# EAGLE board MicroViewUSB-Panel-v02 (EAGLE 6.5.0), part 1 of 2
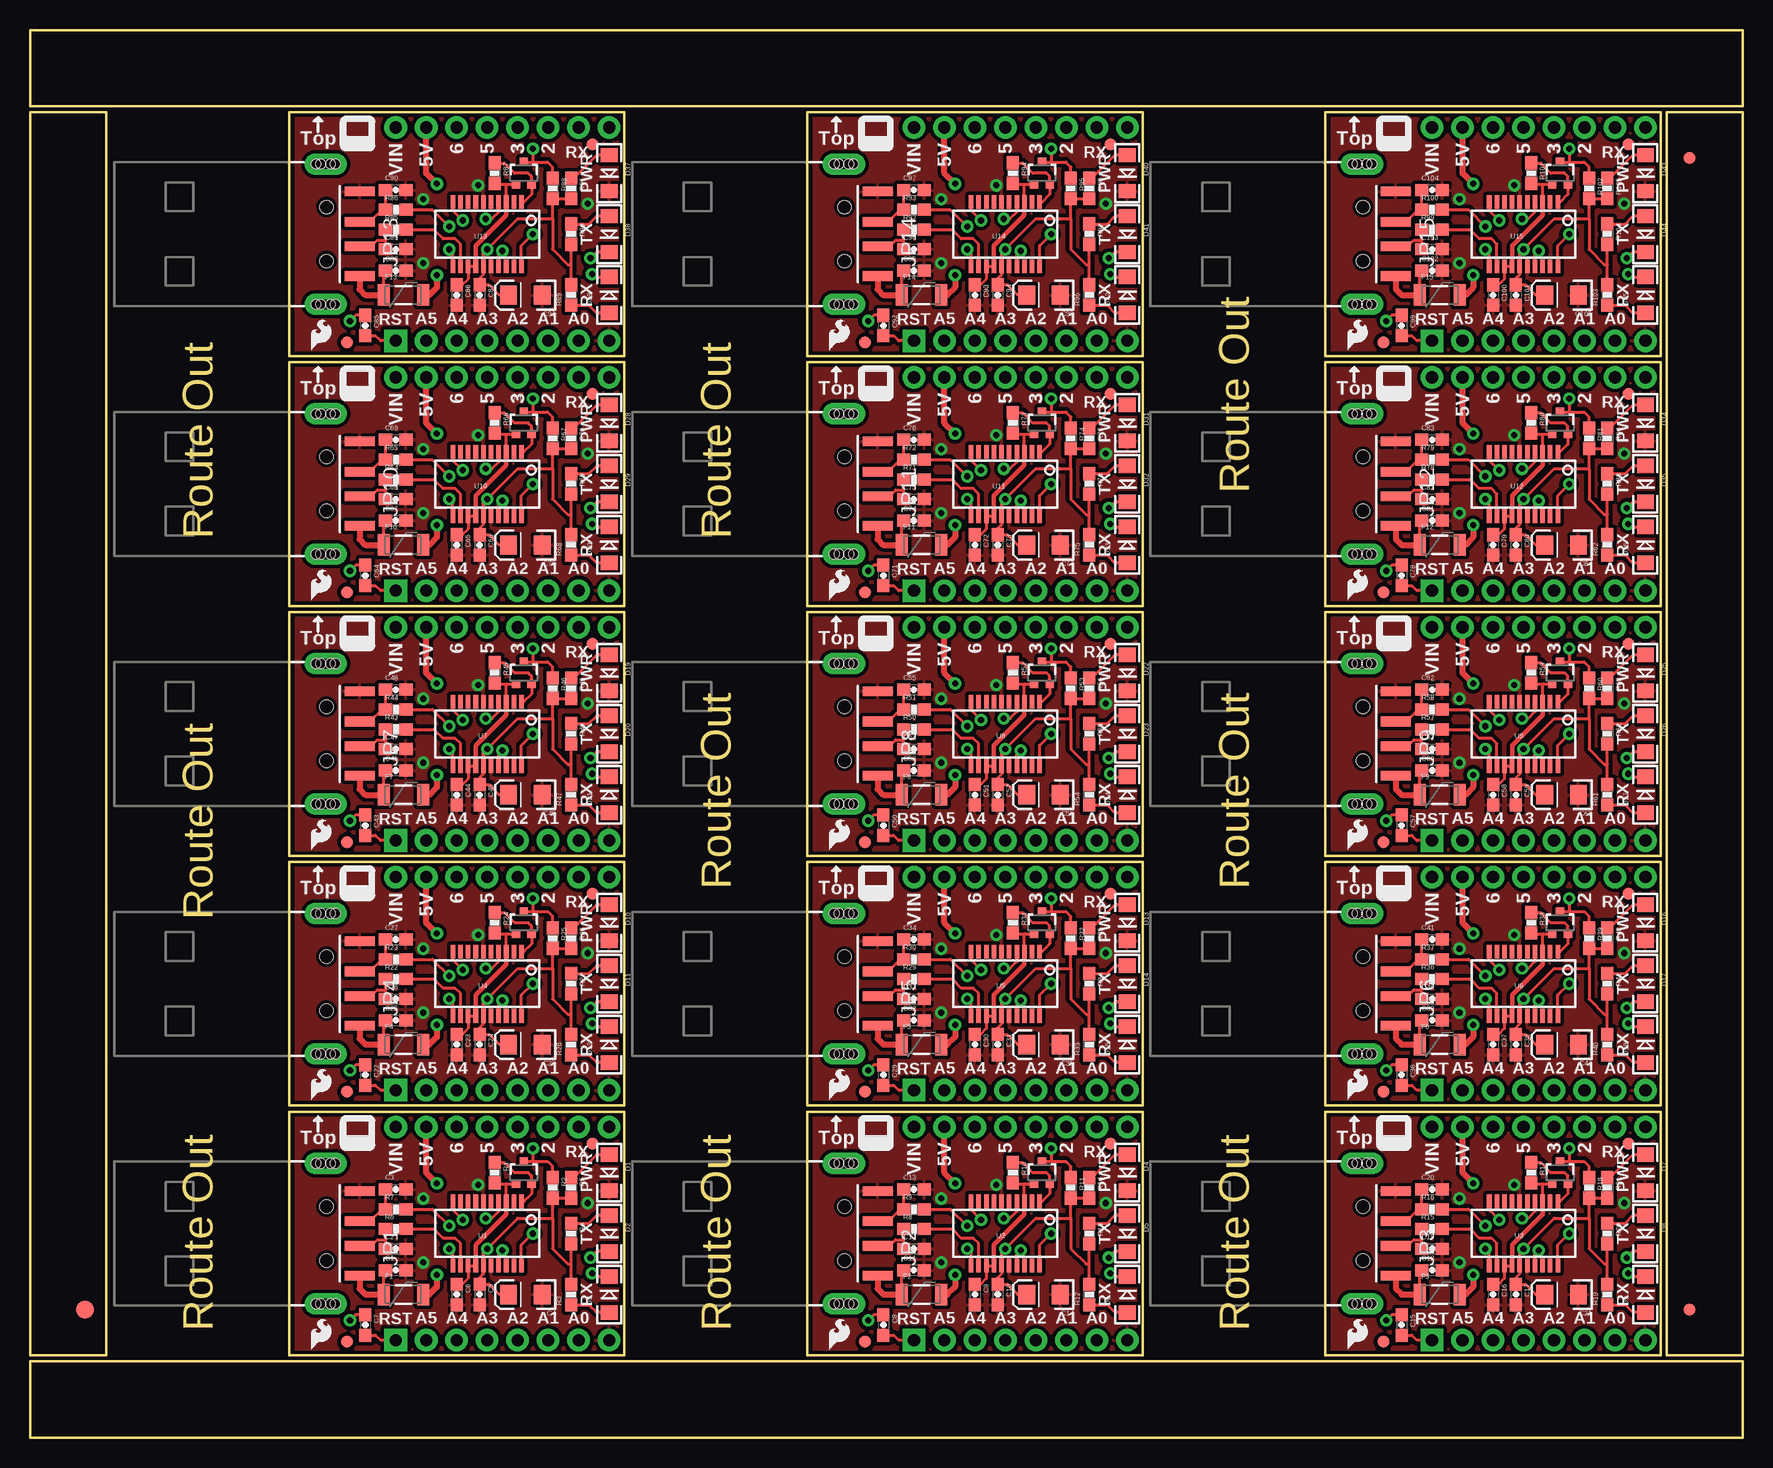
[diagram p0: board, top side]
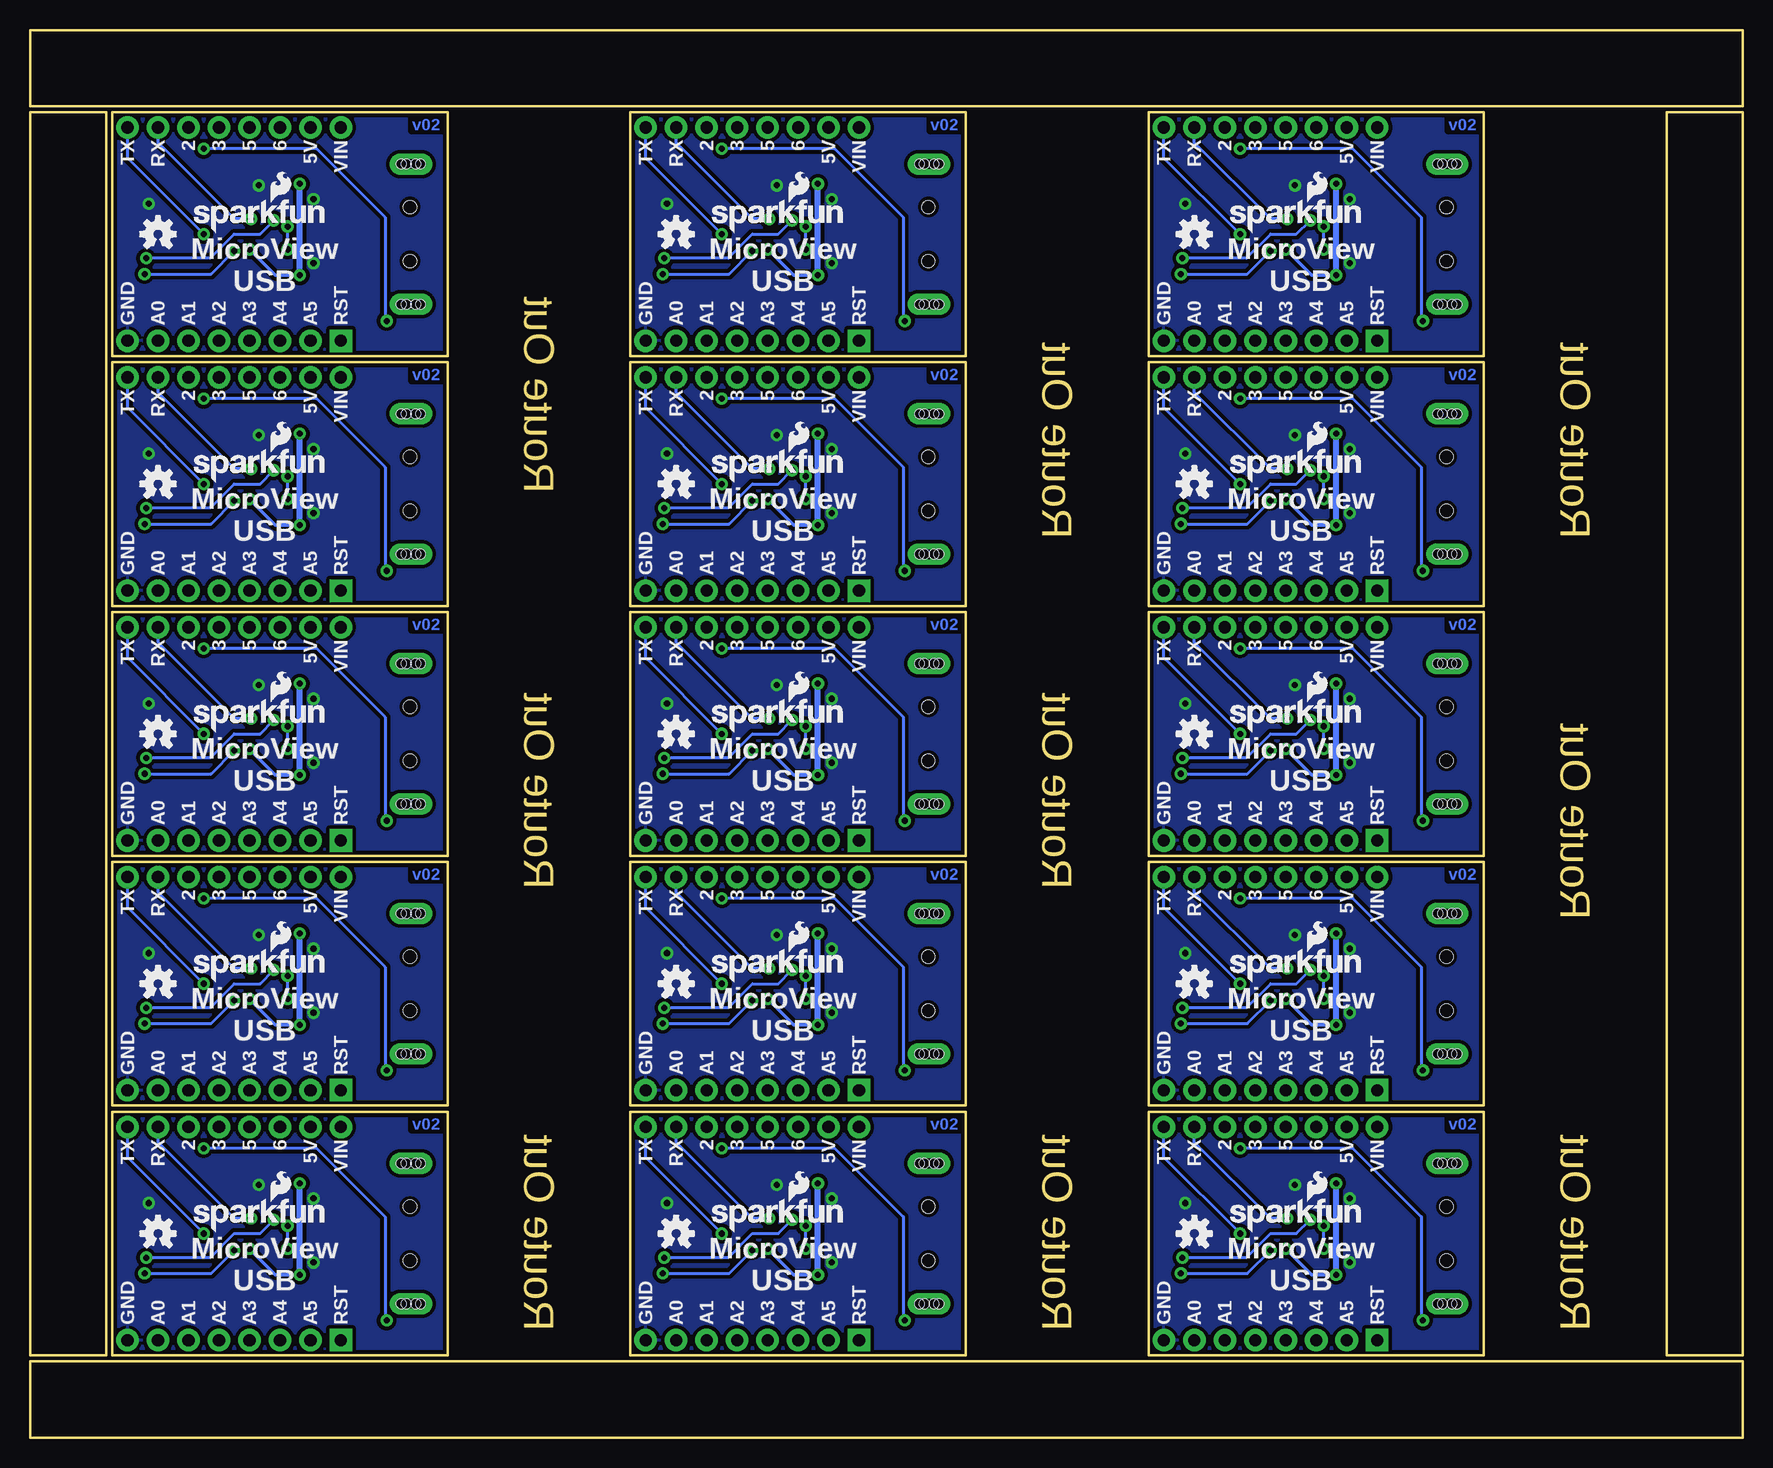
[diagram p1: board, bottom side, seen from below]

Size 142.75 x 117.35 mm. Coordinates in mm from the lower left corner, seen from the top.
Outline: 21.59,6.86 49.53,6.86 49.53,27.18 21.59,27.18 21.59,6.86
Outline: 64.77,6.86 92.71,6.86 92.71,27.18 64.77,27.18 64.77,6.86
Outline: 107.95,6.86 135.89,6.86 135.89,27.18 107.95,27.18 107.95,6.86
Outline: 21.59,27.69 49.53,27.69 49.53,48.01 21.59,48.01 21.59,27.69
Outline: 64.77,27.69 92.71,27.69 92.71,48.01 64.77,48.01 64.77,27.69
Outline: 107.95,27.69 135.89,27.69 135.89,48.01 107.95,48.01 107.95,27.69
Outline: 21.59,48.51 49.53,48.51 49.53,68.83 21.59,68.83 21.59,48.51
Outline: 64.77,48.51 92.71,48.51 92.71,68.83 64.77,68.83 64.77,48.51
Outline: 107.95,48.51 135.89,48.51 135.89,68.83 107.95,68.83 107.95,48.51
Outline: 21.59,69.34 49.53,69.34 49.53,89.66 21.59,89.66 21.59,69.34
Outline: 64.77,69.34 92.71,69.34 92.71,89.66 64.77,89.66 64.77,69.34
Outline: 107.95,69.34 135.89,69.34 135.89,89.66 107.95,89.66 107.95,69.34
Outline: 21.59,90.17 49.53,90.17 49.53,110.49 21.59,110.49 21.59,90.17
Outline: 64.77,90.17 92.71,90.17 92.71,110.49 64.77,110.49 64.77,90.17
Outline: 107.95,90.17 135.89,90.17 135.89,110.49 107.95,110.49 107.95,90.17
Outline: 6.35,6.86 6.35,110.49 0,110.49 0,6.86 6.35,6.86
Outline: 0,0 142.75,0 142.75,6.35 0,6.35 0,0
Outline: 0,111 142.75,111 142.75,117.35 0,117.35 0,111
Outline: 136.4,110.49 136.4,6.86 142.75,6.86 142.75,110.49 136.4,110.49
Copper layers (1*16): Top 0.035mm / dielectric 1.5mm / Bottom 0.035mm
Design rules "SparkFun-2-layer": minimum track width 7mil, minimum drill 15mil, track to track 8mil, track to pad 8mil, pad to pad 8mil, via to via 8mil, smd to smd 8mil, copper to edge 8mil, drill to drill 8mil, minimum pad ring 12mil, minimum via ring 10mil, stop-mask expansion 4mil, vias tented up to drill 20mil, thermal gap 10mil
Net classes: 0 default: width 0.152 mm, drill 0.305 mm, clearance 0.152 mm

## Footprints (pad centres in the part's own frame; a part is rotated, then mirrored left to right if it is on the bottom)
0603-CAP = smd 1.1 x 1: 1 -0.85,0; 2 0.85,0
EIA3216 = smd 1.4 x 1.6: A 1.4,0; C -1.4,0
LED-1206 = smd 1.2 x 1.4: A -1.5,0; C 1.5,0
FIDUCIAL-1.5X3 = smd 1.5 x 1.5: 1 0,0
FIDUCIAL-1X2 = smd 1 x 1: 1 0,0
PTC-1206-WIDE = smd 1 x 1.8: 1 -1.654,0; 2 1.654,0
MV-DIP16-NODIMENSION = drill 1.016 pad 1.88 square: 1 0,0 | drill 1.016 pad 1.88: 2 2.54,0; 3 5.08,0; 4 7.62,0; 5 10.16,0; 6 12.7,0; 7 15.24,0; 8 17.78,0; 9 17.78,17.78; 10 15.24,17.78; 11 12.7,17.78; 12 10.16,17.78; 13 7.62,17.78; 14 5.08,17.78; 15 2.54,17.78; 16 0,17.78
USB-A-SMT-MALE = smd 0.8 x 2.5: D+1 1.027,-5.87; D-1 -1.027,-5.87; GND1 3.551,-5.87; VBUS1 -3.5,-5.87 | drill 0.8 pad 1.778 long: P$1 5.85,-3.05; P$3 -5.85,-3.05 | hole 1.1: 2.25,-3.12; -2.25,-3.12 | hole 0.8: -5.85,-3.45; -5.85,-3.85; -5.85,-2.65; -5.85,-2.25; 5.85,-3.45; 5.85,-3.85; 5.85,-2.65; 5.85,-2.25
SOT323 = smd 0.7 x 0.7: 1 -0.65,-0.925; 2 0.65,-0.925; 3 0,0.925
0603-RES = smd 1.1 x 1: 1 -0.85,0; 2 0.85,0
SSOP20_L = smd 0.381 x 1.143: 1 -2.857,-2.68; 2 -2.223,-2.68; 3 -1.587,-2.68; 4 -0.953,-2.68; 5 -0.318,-2.68; 6 0.318,-2.68; 7 0.953,-2.68; 8 1.587,-2.68; 9 2.223,-2.68; 10 2.857,-2.68; 11 2.857,2.68; 12 2.223,2.68; 13 1.587,2.68; 14 0.953,2.68; 15 0.318,2.68; 16 -0.318,2.68; 17 -0.953,2.68; 18 -1.587,2.68; 19 -2.223,2.68; 20 -2.857,2.68

## Placement (x,y rotation side)
C1  0.1uF  [0603-CAP]  30.48,13.97 0 top
C2  47pF  [0603-CAP]  30.48,15.75 0 top
C3  47pF  [0603-CAP]  30.48,20.7 0 top
C4  10uF  [EIA3216]  41.27,11.94 180 top
C5  0.1uF  [0603-CAP]  37.47,11.94 270 top
C6  0.1uF  [0603-CAP]  35.56,11.94 270 top
C7  0.1uF  [0603-CAP]  27.94,9.4 270 top
C8  0.1uF  [0603-CAP]  71.12,9.4 270 top
C9  0.1uF  [0603-CAP]  78.74,11.94 270 top
C10  0.1uF  [0603-CAP]  80.64,11.94 270 top
C11  0.1uF  [0603-CAP]  73.66,13.97 0 top
C12  47pF  [0603-CAP]  73.66,15.75 0 top
C13  47pF  [0603-CAP]  73.66,20.7 0 top
C14  10uF  [EIA3216]  84.45,11.94 180 top
C15  0.1uF  [0603-CAP]  114.3,9.4 270 top
C16  0.1uF  [0603-CAP]  121.92,11.94 270 top
C17  0.1uF  [0603-CAP]  123.83,11.94 270 top
C18  0.1uF  [0603-CAP]  116.84,13.97 0 top
C19  47pF  [0603-CAP]  116.84,15.75 0 top
C20  47pF  [0603-CAP]  116.84,20.7 0 top
C21  10uF  [EIA3216]  127.64,11.94 180 top
C22  0.1uF  [0603-CAP]  27.94,30.23 270 top
C23  0.1uF  [0603-CAP]  35.56,32.77 270 top
C24  0.1uF  [0603-CAP]  37.47,32.77 270 top
C25  0.1uF  [0603-CAP]  30.48,34.8 0 top
C26  47pF  [0603-CAP]  30.48,36.58 0 top
C27  47pF  [0603-CAP]  30.48,41.53 0 top
C28  10uF  [EIA3216]  41.27,32.77 180 top
C29  0.1uF  [0603-CAP]  71.12,30.23 270 top
C30  0.1uF  [0603-CAP]  78.74,32.77 270 top
C31  0.1uF  [0603-CAP]  80.64,32.77 270 top
C32  0.1uF  [0603-CAP]  73.66,34.8 0 top
C33  47pF  [0603-CAP]  73.66,36.58 0 top
C34  47pF  [0603-CAP]  73.66,41.53 0 top
C35  10uF  [EIA3216]  84.45,32.77 180 top
C36  0.1uF  [0603-CAP]  114.3,30.23 270 top
C37  0.1uF  [0603-CAP]  121.92,32.77 270 top
C38  0.1uF  [0603-CAP]  123.83,32.77 270 top
C39  0.1uF  [0603-CAP]  116.84,34.8 0 top
C40  47pF  [0603-CAP]  116.84,36.58 0 top
C41  47pF  [0603-CAP]  116.84,41.53 0 top
C42  10uF  [EIA3216]  127.64,32.77 180 top
C43  0.1uF  [0603-CAP]  27.94,51.05 270 top
C44  0.1uF  [0603-CAP]  35.56,53.59 270 top
C45  0.1uF  [0603-CAP]  37.47,53.59 270 top
C46  0.1uF  [0603-CAP]  30.48,55.63 0 top
C47  47pF  [0603-CAP]  30.48,57.4 0 top
C48  47pF  [0603-CAP]  30.48,62.36 0 top
C49  10uF  [EIA3216]  41.27,53.59 180 top
C50  0.1uF  [0603-CAP]  71.12,51.05 270 top
C51  0.1uF  [0603-CAP]  78.74,53.59 270 top
C52  0.1uF  [0603-CAP]  80.64,53.59 270 top
C53  0.1uF  [0603-CAP]  73.66,55.63 0 top
C54  47pF  [0603-CAP]  73.66,57.4 0 top
C55  47pF  [0603-CAP]  73.66,62.36 0 top
C56  10uF  [EIA3216]  84.45,53.59 180 top
C57  0.1uF  [0603-CAP]  114.3,51.05 270 top
C58  0.1uF  [0603-CAP]  121.92,53.59 270 top
C59  0.1uF  [0603-CAP]  123.83,53.59 270 top
C60  0.1uF  [0603-CAP]  116.84,55.63 0 top
C61  47pF  [0603-CAP]  116.84,57.4 0 top
C62  47pF  [0603-CAP]  116.84,62.36 0 top
C63  10uF  [EIA3216]  127.64,53.59 180 top
C64  0.1uF  [0603-CAP]  27.94,71.88 270 top
C65  0.1uF  [0603-CAP]  35.56,74.42 270 top
C66  0.1uF  [0603-CAP]  37.47,74.42 270 top
C67  0.1uF  [0603-CAP]  30.48,76.45 0 top
C68  47pF  [0603-CAP]  30.48,78.23 0 top
C69  47pF  [0603-CAP]  30.48,83.19 0 top
C70  10uF  [EIA3216]  41.27,74.42 180 top
C71  0.1uF  [0603-CAP]  71.12,71.88 270 top
C72  0.1uF  [0603-CAP]  78.74,74.42 270 top
C73  0.1uF  [0603-CAP]  80.64,74.42 270 top
C74  0.1uF  [0603-CAP]  73.66,76.45 0 top
C75  47pF  [0603-CAP]  73.66,78.23 0 top
C76  47pF  [0603-CAP]  73.66,83.19 0 top
C77  10uF  [EIA3216]  84.45,74.42 180 top
C78  0.1uF  [0603-CAP]  114.3,71.88 270 top
C79  0.1uF  [0603-CAP]  121.92,74.42 270 top
C80  0.1uF  [0603-CAP]  123.83,74.42 270 top
C81  0.1uF  [0603-CAP]  116.84,76.45 0 top
C82  47pF  [0603-CAP]  116.84,78.23 0 top
C83  47pF  [0603-CAP]  116.84,83.19 0 top
C84  10uF  [EIA3216]  127.64,74.42 180 top
C85  0.1uF  [0603-CAP]  27.94,92.71 270 top
C86  0.1uF  [0603-CAP]  35.56,95.25 270 top
C87  0.1uF  [0603-CAP]  37.47,95.25 270 top
C88  0.1uF  [0603-CAP]  30.48,97.28 0 top
C89  47pF  [0603-CAP]  30.48,99.06 0 top
C90  47pF  [0603-CAP]  30.48,104.01 0 top
C91  10uF  [EIA3216]  41.27,95.25 180 top
C92  0.1uF  [0603-CAP]  71.12,92.71 270 top
C93  0.1uF  [0603-CAP]  78.74,95.25 270 top
C94  0.1uF  [0603-CAP]  80.64,95.25 270 top
C95  0.1uF  [0603-CAP]  73.66,97.28 0 top
C96  47pF  [0603-CAP]  73.66,99.06 0 top
C97  47pF  [0603-CAP]  73.66,104.01 0 top
C98  10uF  [EIA3216]  84.45,95.25 180 top
C99  0.1uF  [0603-CAP]  114.3,92.71 270 top
C100  0.1uF  [0603-CAP]  121.92,95.25 270 top
C101  0.1uF  [0603-CAP]  123.83,95.25 270 top
C102  0.1uF  [0603-CAP]  116.84,97.28 0 top
C103  47pF  [0603-CAP]  116.84,99.06 0 top
C104  47pF  [0603-CAP]  116.84,104.01 0 top
C105  10uF  [EIA3216]  127.64,95.25 180 top
D1  GREEN  [LED-1206]  48.26,22.1 270 top
D2  RED  [LED-1206]  48.26,17.02 270 top
D3  Yellow  [LED-1206]  48.26,11.94 90 top
D4  GREEN  [LED-1206]  91.44,22.1 270 top
D5  RED  [LED-1206]  91.44,17.02 270 top
D6  Yellow  [LED-1206]  91.44,11.94 90 top
D7  GREEN  [LED-1206]  134.62,22.1 270 top
D8  RED  [LED-1206]  134.62,17.02 270 top
D9  Yellow  [LED-1206]  134.62,11.94 90 top
D10  GREEN  [LED-1206]  48.26,42.93 270 top
D11  RED  [LED-1206]  48.26,37.85 270 top
D12  Yellow  [LED-1206]  48.26,32.77 90 top
D13  GREEN  [LED-1206]  91.44,42.93 270 top
D14  RED  [LED-1206]  91.44,37.85 270 top
D15  Yellow  [LED-1206]  91.44,32.77 90 top
D16  GREEN  [LED-1206]  134.62,42.93 270 top
D17  RED  [LED-1206]  134.62,37.85 270 top
D18  Yellow  [LED-1206]  134.62,32.77 90 top
D19  GREEN  [LED-1206]  48.26,63.75 270 top
D20  RED  [LED-1206]  48.26,58.67 270 top
D21  Yellow  [LED-1206]  48.26,53.59 90 top
D22  GREEN  [LED-1206]  91.44,63.75 270 top
D23  RED  [LED-1206]  91.44,58.67 270 top
D24  Yellow  [LED-1206]  91.44,53.59 90 top
D25  GREEN  [LED-1206]  134.62,63.75 270 top
D26  RED  [LED-1206]  134.62,58.67 270 top
D27  Yellow  [LED-1206]  134.62,53.59 90 top
D28  GREEN  [LED-1206]  48.26,84.58 270 top
D29  RED  [LED-1206]  48.26,79.5 270 top
D30  Yellow  [LED-1206]  48.26,74.42 90 top
D31  GREEN  [LED-1206]  91.44,84.58 270 top
D32  RED  [LED-1206]  91.44,79.5 270 top
D33  Yellow  [LED-1206]  91.44,74.42 90 top
D34  GREEN  [LED-1206]  134.62,84.58 270 top
D35  RED  [LED-1206]  134.62,79.5 270 top
D36  Yellow  [LED-1206]  134.62,74.42 90 top
D37  GREEN  [LED-1206]  48.26,105.41 270 top
D38  RED  [LED-1206]  48.26,100.33 270 top
D39  Yellow  [LED-1206]  48.26,95.25 90 top
D40  GREEN  [LED-1206]  91.44,105.41 270 top
D41  RED  [LED-1206]  91.44,100.33 270 top
D42  Yellow  [LED-1206]  91.44,95.25 90 top
D43  GREEN  [LED-1206]  134.62,105.41 270 top
D44  RED  [LED-1206]  134.62,100.33 270 top
D45  Yellow  [LED-1206]  134.62,95.25 90 top
E$1  [FIDUCIAL-1.5X3]  4.57,10.67 0 top
E$6  [FIDUCIAL-1X2]  138.3,106.68 180 top
E$8  [FIDUCIAL-1X2]  138.3,10.67 0 top
F1  500mA  [PTC-1206-WIDE]  31.11,11.94 0 top
F2  500mA  [PTC-1206-WIDE]  74.3,11.94 0 top
F3  500mA  [PTC-1206-WIDE]  117.47,11.94 0 top
F4  500mA  [PTC-1206-WIDE]  31.11,32.77 0 top
F5  500mA  [PTC-1206-WIDE]  74.3,32.77 0 top
F6  500mA  [PTC-1206-WIDE]  117.47,32.77 0 top
F7  500mA  [PTC-1206-WIDE]  31.11,53.59 0 top
F8  500mA  [PTC-1206-WIDE]  74.3,53.59 0 top
F9  500mA  [PTC-1206-WIDE]  117.47,53.59 0 top
F10  500mA  [PTC-1206-WIDE]  31.11,74.42 0 top
F11  500mA  [PTC-1206-WIDE]  74.3,74.42 0 top
F12  500mA  [PTC-1206-WIDE]  117.47,74.42 0 top
F13  500mA  [PTC-1206-WIDE]  31.11,95.25 0 top
F14  500mA  [PTC-1206-WIDE]  74.3,95.25 0 top
F15  500mA  [PTC-1206-WIDE]  117.47,95.25 0 top
FID1  FIDUCIAL1X2  [FIDUCIAL-1X2]  26.42,8 0 top
FID2  FIDUCIAL1X2  [FIDUCIAL-1X2]  46.86,24.51 0 top
FID3  FIDUCIAL1X2  [FIDUCIAL-1X2]  69.6,8 0 top
FID4  FIDUCIAL1X2  [FIDUCIAL-1X2]  90.04,24.51 0 top
FID5  FIDUCIAL1X2  [FIDUCIAL-1X2]  112.78,8 0 top
FID6  FIDUCIAL1X2  [FIDUCIAL-1X2]  133.22,24.51 0 top
FID7  FIDUCIAL1X2  [FIDUCIAL-1X2]  26.42,28.83 0 top
FID8  FIDUCIAL1X2  [FIDUCIAL-1X2]  46.86,45.34 0 top
FID9  FIDUCIAL1X2  [FIDUCIAL-1X2]  69.6,28.83 0 top
FID10  FIDUCIAL1X2  [FIDUCIAL-1X2]  90.04,45.34 0 top
FID11  FIDUCIAL1X2  [FIDUCIAL-1X2]  112.78,28.83 0 top
FID12  FIDUCIAL1X2  [FIDUCIAL-1X2]  133.22,45.34 0 top
FID13  FIDUCIAL1X2  [FIDUCIAL-1X2]  26.42,49.66 0 top
FID14  FIDUCIAL1X2  [FIDUCIAL-1X2]  46.86,66.17 0 top
FID15  FIDUCIAL1X2  [FIDUCIAL-1X2]  69.6,49.66 0 top
FID16  FIDUCIAL1X2  [FIDUCIAL-1X2]  90.04,66.17 0 top
FID17  FIDUCIAL1X2  [FIDUCIAL-1X2]  112.78,49.66 0 top
FID18  FIDUCIAL1X2  [FIDUCIAL-1X2]  133.22,66.17 0 top
FID19  FIDUCIAL1X2  [FIDUCIAL-1X2]  26.42,70.48 0 top
FID20  FIDUCIAL1X2  [FIDUCIAL-1X2]  46.86,87 0 top
FID21  FIDUCIAL1X2  [FIDUCIAL-1X2]  69.6,70.48 0 top
FID22  FIDUCIAL1X2  [FIDUCIAL-1X2]  90.04,87 0 top
FID23  FIDUCIAL1X2  [FIDUCIAL-1X2]  112.78,70.48 0 top
FID24  FIDUCIAL1X2  [FIDUCIAL-1X2]  133.22,87 0 top
FID25  FIDUCIAL1X2  [FIDUCIAL-1X2]  26.42,91.31 0 top
FID26  FIDUCIAL1X2  [FIDUCIAL-1X2]  46.86,107.82 0 top
FID27  FIDUCIAL1X2  [FIDUCIAL-1X2]  69.6,91.31 0 top
FID28  FIDUCIAL1X2  [FIDUCIAL-1X2]  90.04,107.82 0 top
FID29  FIDUCIAL1X2  [FIDUCIAL-1X2]  112.78,91.31 0 top
FID30  FIDUCIAL1X2  [FIDUCIAL-1X2]  133.22,107.82 0 top
J1  MICROVIEW-16ND  [MV-DIP16-NODIMENSION]  30.48,8.13 0 top
J2  MICROVIEW-16ND  [MV-DIP16-NODIMENSION]  73.66,8.13 0 top
J3  MICROVIEW-16ND  [MV-DIP16-NODIMENSION]  116.84,8.13 0 top
J4  MICROVIEW-16ND  [MV-DIP16-NODIMENSION]  30.48,28.96 0 top
J5  MICROVIEW-16ND  [MV-DIP16-NODIMENSION]  73.66,28.96 0 top
J6  MICROVIEW-16ND  [MV-DIP16-NODIMENSION]  116.84,28.96 0 top
J7  MICROVIEW-16ND  [MV-DIP16-NODIMENSION]  30.48,49.78 0 top
J8  MICROVIEW-16ND  [MV-DIP16-NODIMENSION]  73.66,49.78 0 top
J9  MICROVIEW-16ND  [MV-DIP16-NODIMENSION]  116.84,49.78 0 top
J10  MICROVIEW-16ND  [MV-DIP16-NODIMENSION]  30.48,70.61 0 top
J11  MICROVIEW-16ND  [MV-DIP16-NODIMENSION]  73.66,70.61 0 top
J12  MICROVIEW-16ND  [MV-DIP16-NODIMENSION]  116.84,70.61 0 top
J13  MICROVIEW-16ND  [MV-DIP16-NODIMENSION]  30.48,91.44 0 top
J14  MICROVIEW-16ND  [MV-DIP16-NODIMENSION]  73.66,91.44 0 top
J15  MICROVIEW-16ND  [MV-DIP16-NODIMENSION]  116.84,91.44 0 top
JP1  USBA-SMD-MALE  [USB-A-SMT-MALE]  21.59,17.02 90 top
JP2  USBA-SMD-MALE  [USB-A-SMT-MALE]  64.77,17.02 90 top
JP3  USBA-SMD-MALE  [USB-A-SMT-MALE]  107.95,17.02 90 top
JP4  USBA-SMD-MALE  [USB-A-SMT-MALE]  21.59,37.85 90 top
JP5  USBA-SMD-MALE  [USB-A-SMT-MALE]  64.77,37.85 90 top
JP6  USBA-SMD-MALE  [USB-A-SMT-MALE]  107.95,37.85 90 top
JP7  USBA-SMD-MALE  [USB-A-SMT-MALE]  21.59,58.67 90 top
JP8  USBA-SMD-MALE  [USB-A-SMT-MALE]  64.77,58.67 90 top
JP9  USBA-SMD-MALE  [USB-A-SMT-MALE]  107.95,58.67 90 top
JP10  USBA-SMD-MALE  [USB-A-SMT-MALE]  21.59,79.5 90 top
JP11  USBA-SMD-MALE  [USB-A-SMT-MALE]  64.77,79.5 90 top
JP12  USBA-SMD-MALE  [USB-A-SMT-MALE]  107.95,79.5 90 top
JP13  USBA-SMD-MALE  [USB-A-SMT-MALE]  21.59,100.33 90 top
JP14  USBA-SMD-MALE  [USB-A-SMT-MALE]  64.77,100.33 90 top
JP15  USBA-SMD-MALE  [USB-A-SMT-MALE]  107.95,100.33 90 top
LOGO1  SFE_LOGO_FLAME.1_INCH  [SFE_LOGO_FLAME_.1]  23.11,6.99 0 top
LOGO2  OSHW-LOGOS  [OSHW-LOGO-S]  45.72,17.02 0 bottom
LOGO3  SFE_LOGO_NAME_FLAME.1_INCH  [SFE_LOGO_NAME_FLAME_.1]  43.18,17.02 0 bottom
LOGO4  OSHW-LOGOS  [OSHW-LOGO-S]  88.9,17.02 0 bottom
LOGO5  SFE_LOGO_FLAME.1_INCH  [SFE_LOGO_FLAME_.1]  66.29,6.99 0 top
LOGO6  SFE_LOGO_NAME_FLAME.1_INCH  [SFE_LOGO_NAME_FLAME_.1]  86.36,17.02 0 bottom
LOGO7  OSHW-LOGOS  [OSHW-LOGO-S]  132.08,17.02 0 bottom
LOGO8  SFE_LOGO_FLAME.1_INCH  [SFE_LOGO_FLAME_.1]  109.47,6.99 0 top
LOGO9  SFE_LOGO_NAME_FLAME.1_INCH  [SFE_LOGO_NAME_FLAME_.1]  129.54,17.02 0 bottom
LOGO10  OSHW-LOGOS  [OSHW-LOGO-S]  45.72,37.85 0 bottom
LOGO11  SFE_LOGO_FLAME.1_INCH  [SFE_LOGO_FLAME_.1]  23.11,27.81 0 top
LOGO12  SFE_LOGO_NAME_FLAME.1_INCH  [SFE_LOGO_NAME_FLAME_.1]  43.18,37.85 0 bottom
LOGO13  OSHW-LOGOS  [OSHW-LOGO-S]  88.9,37.85 0 bottom
LOGO14  SFE_LOGO_FLAME.1_INCH  [SFE_LOGO_FLAME_.1]  66.29,27.81 0 top
LOGO15  SFE_LOGO_NAME_FLAME.1_INCH  [SFE_LOGO_NAME_FLAME_.1]  86.36,37.85 0 bottom
LOGO16  OSHW-LOGOS  [OSHW-LOGO-S]  132.08,37.85 0 bottom
LOGO17  SFE_LOGO_FLAME.1_INCH  [SFE_LOGO_FLAME_.1]  109.47,27.81 0 top
LOGO18  SFE_LOGO_NAME_FLAME.1_INCH  [SFE_LOGO_NAME_FLAME_.1]  129.54,37.85 0 bottom
LOGO19  OSHW-LOGOS  [OSHW-LOGO-S]  45.72,58.67 0 bottom
LOGO20  SFE_LOGO_FLAME.1_INCH  [SFE_LOGO_FLAME_.1]  23.11,48.64 0 top
LOGO21  SFE_LOGO_NAME_FLAME.1_INCH  [SFE_LOGO_NAME_FLAME_.1]  43.18,58.67 0 bottom
LOGO22  OSHW-LOGOS  [OSHW-LOGO-S]  88.9,58.67 0 bottom
LOGO23  SFE_LOGO_FLAME.1_INCH  [SFE_LOGO_FLAME_.1]  66.29,48.64 0 top
LOGO24  SFE_LOGO_NAME_FLAME.1_INCH  [SFE_LOGO_NAME_FLAME_.1]  86.36,58.67 0 bottom
LOGO25  OSHW-LOGOS  [OSHW-LOGO-S]  132.08,58.67 0 bottom
LOGO26  SFE_LOGO_FLAME.1_INCH  [SFE_LOGO_FLAME_.1]  109.47,48.64 0 top
LOGO27  SFE_LOGO_NAME_FLAME.1_INCH  [SFE_LOGO_NAME_FLAME_.1]  129.54,58.67 0 bottom
LOGO28  OSHW-LOGOS  [OSHW-LOGO-S]  45.72,79.5 0 bottom
LOGO29  SFE_LOGO_FLAME.1_INCH  [SFE_LOGO_FLAME_.1]  23.11,69.47 0 top
LOGO30  SFE_LOGO_NAME_FLAME.1_INCH  [SFE_LOGO_NAME_FLAME_.1]  43.18,79.5 0 bottom
LOGO31  OSHW-LOGOS  [OSHW-LOGO-S]  88.9,79.5 0 bottom
LOGO32  SFE_LOGO_FLAME.1_INCH  [SFE_LOGO_FLAME_.1]  66.29,69.47 0 top
LOGO33  SFE_LOGO_NAME_FLAME.1_INCH  [SFE_LOGO_NAME_FLAME_.1]  86.36,79.5 0 bottom
LOGO34  OSHW-LOGOS  [OSHW-LOGO-S]  132.08,79.5 0 bottom
LOGO35  SFE_LOGO_FLAME.1_INCH  [SFE_LOGO_FLAME_.1]  109.47,69.47 0 top
LOGO36  SFE_LOGO_NAME_FLAME.1_INCH  [SFE_LOGO_NAME_FLAME_.1]  129.54,79.5 0 bottom
LOGO37  OSHW-LOGOS  [OSHW-LOGO-S]  45.72,100.33 0 bottom
LOGO38  SFE_LOGO_FLAME.1_INCH  [SFE_LOGO_FLAME_.1]  23.11,90.3 0 top
LOGO39  SFE_LOGO_NAME_FLAME.1_INCH  [SFE_LOGO_NAME_FLAME_.1]  43.18,100.33 0 bottom
LOGO40  OSHW-LOGOS  [OSHW-LOGO-S]  88.9,100.33 0 bottom
LOGO41  SFE_LOGO_FLAME.1_INCH  [SFE_LOGO_FLAME_.1]  66.29,90.3 0 top
LOGO42  SFE_LOGO_NAME_FLAME.1_INCH  [SFE_LOGO_NAME_FLAME_.1]  86.36,100.33 0 bottom
LOGO43  OSHW-LOGOS  [OSHW-LOGO-S]  132.08,100.33 0 bottom
LOGO44  SFE_LOGO_FLAME.1_INCH  [SFE_LOGO_FLAME_.1]  109.47,90.3 0 top
LOGO45  SFE_LOGO_NAME_FLAME.1_INCH  [SFE_LOGO_NAME_FLAME_.1]  129.54,100.33 0 bottom
Q1  2N7002PW  [SOT323]  41.15,22.1 0 top
Q2  2N7002PW  [SOT323]  84.33,22.1 0 top
Q3  2N7002PW  [SOT323]  127.51,22.1 0 top
Q4  2N7002PW  [SOT323]  41.15,42.93 0 top
Q5  2N7002PW  [SOT323]  84.33,42.93 0 top
Q6  2N7002PW  [SOT323]  127.51,42.93 0 top
Q7  2N7002PW  [SOT323]  41.15,63.75 0 top
Q8  2N7002PW  [SOT323]  84.33,63.75 0 top
Q9  2N7002PW  [SOT323]  127.51,63.75 0 top
Q10  2N7002PW  [SOT323]  41.15,84.58 0 top
Q11  2N7002PW  [SOT323]  84.33,84.58 0 top
Q12  2N7002PW  [SOT323]  127.51,84.58 0 top
Q13  2N7002PW  [SOT323]  41.15,105.41 0 top
Q14  2N7002PW  [SOT323]  84.33,105.41 0 top
Q15  2N7002PW  [SOT323]  127.51,105.41 0 top
R1  10K  [0603-RES]  38.73,22.1 270 top
R2  10K  [0603-RES]  43.56,20.83 270 top
R3  1K  [0603-RES]  45.09,11.94 90 top
R4  1K  [0603-RES]  45.09,17.02 270 top
R5  1K  [0603-RES]  45.09,20.83 270 top
R6  27  [0603-RES]  30.48,17.4 0 top
R7  27  [0603-RES]  30.48,19.05 0 top
R8  27  [0603-RES]  73.66,17.4 0 top
R9  27  [0603-RES]  73.66,19.05 0 top
R10  10K  [0603-RES]  81.92,22.1 270 top
R11  10K  [0603-RES]  86.74,20.83 270 top
R12  1K  [0603-RES]  88.27,11.94 90 top
R13  1K  [0603-RES]  88.27,17.02 270 top
R14  1K  [0603-RES]  88.27,20.83 270 top
R15  27  [0603-RES]  116.84,17.4 0 top
R16  27  [0603-RES]  116.84,19.05 0 top
R17  10K  [0603-RES]  125.09,22.1 270 top
R18  10K  [0603-RES]  129.92,20.83 270 top
R19  1K  [0603-RES]  131.44,11.94 90 top
R20  1K  [0603-RES]  131.44,17.02 270 top
R21  1K  [0603-RES]  131.44,20.83 270 top
R22  27  [0603-RES]  30.48,38.23 0 top
R23  27  [0603-RES]  30.48,39.88 0 top
R24  10K  [0603-RES]  38.73,42.93 270 top
R25  10K  [0603-RES]  43.56,41.66 270 top
R26  1K  [0603-RES]  45.09,32.77 90 top
R27  1K  [0603-RES]  45.09,37.85 270 top
R28  1K  [0603-RES]  45.09,41.66 270 top
R29  27  [0603-RES]  73.66,38.23 0 top
R30  27  [0603-RES]  73.66,39.88 0 top
R31  10K  [0603-RES]  81.92,42.93 270 top
R32  10K  [0603-RES]  86.74,41.66 270 top
R33  1K  [0603-RES]  88.27,32.77 90 top
R34  1K  [0603-RES]  88.27,37.85 270 top
R35  1K  [0603-RES]  88.27,41.66 270 top
R36  27  [0603-RES]  116.84,38.23 0 top
R37  27  [0603-RES]  116.84,39.88 0 top
R38  10K  [0603-RES]  125.09,42.93 270 top
R39  10K  [0603-RES]  129.92,41.66 270 top
R40  1K  [0603-RES]  131.44,32.77 90 top
R41  1K  [0603-RES]  131.44,37.85 270 top
R42  1K  [0603-RES]  131.44,41.66 270 top
R43  27  [0603-RES]  30.48,59.05 0 top
R44  27  [0603-RES]  30.48,60.71 0 top
R45  10K  [0603-RES]  38.73,63.75 270 top
R46  10K  [0603-RES]  43.56,62.48 270 top
R47  1K  [0603-RES]  45.09,53.59 90 top
R48  1K  [0603-RES]  45.09,58.67 270 top
R49  1K  [0603-RES]  45.09,62.48 270 top
R50  27  [0603-RES]  73.66,59.05 0 top
R51  27  [0603-RES]  73.66,60.71 0 top
R52  10K  [0603-RES]  81.92,63.75 270 top
R53  10K  [0603-RES]  86.74,62.48 270 top
R54  1K  [0603-RES]  88.27,53.59 90 top
R55  1K  [0603-RES]  88.27,58.67 270 top
R56  1K  [0603-RES]  88.27,62.48 270 top
R57  27  [0603-RES]  116.84,59.05 0 top
R58  27  [0603-RES]  116.84,60.71 0 top
R59  10K  [0603-RES]  125.09,63.75 270 top
R60  10K  [0603-RES]  129.92,62.48 270 top
R61  1K  [0603-RES]  131.44,53.59 90 top
R62  1K  [0603-RES]  131.44,58.67 270 top
R63  1K  [0603-RES]  131.44,62.48 270 top
R64  27  [0603-RES]  30.48,79.88 0 top
R65  27  [0603-RES]  30.48,81.53 0 top
R66  10K  [0603-RES]  38.73,84.58 270 top
R67  10K  [0603-RES]  43.56,83.31 270 top
R68  1K  [0603-RES]  45.09,74.42 90 top
R69  1K  [0603-RES]  45.09,79.5 270 top
R70  1K  [0603-RES]  45.09,83.31 270 top
R71  27  [0603-RES]  73.66,79.88 0 top
R72  27  [0603-RES]  73.66,81.53 0 top
R73  10K  [0603-RES]  81.92,84.58 270 top
R74  10K  [0603-RES]  86.74,83.31 270 top
R75  1K  [0603-RES]  88.27,74.42 90 top
R76  1K  [0603-RES]  88.27,79.5 270 top
R77  1K  [0603-RES]  88.27,83.31 270 top
R78  27  [0603-RES]  116.84,79.88 0 top
R79  27  [0603-RES]  116.84,81.53 0 top
R80  10K  [0603-RES]  125.09,84.58 270 top
R81  10K  [0603-RES]  129.92,83.31 270 top
R82  1K  [0603-RES]  131.44,74.42 90 top
R83  1K  [0603-RES]  131.44,79.5 270 top
R84  1K  [0603-RES]  131.44,83.31 270 top
R85  27  [0603-RES]  30.48,100.71 0 top
R86  27  [0603-RES]  30.48,102.36 0 top
R87  10K  [0603-RES]  38.73,105.41 270 top
R88  10K  [0603-RES]  43.56,104.14 270 top
R89  1K  [0603-RES]  45.09,95.25 90 top
R90  1K  [0603-RES]  45.09,100.33 270 top
R91  1K  [0603-RES]  45.09,104.14 270 top
R92  27  [0603-RES]  73.66,100.71 0 top
R93  27  [0603-RES]  73.66,102.36 0 top
R94  10K  [0603-RES]  81.92,105.41 270 top
R95  10K  [0603-RES]  86.74,104.14 270 top
R96  1K  [0603-RES]  88.27,95.25 90 top
R97  1K  [0603-RES]  88.27,100.33 270 top
R98  1K  [0603-RES]  88.27,104.14 270 top
R99  27  [0603-RES]  116.84,100.71 0 top
R100  27  [0603-RES]  116.84,102.36 0 top
R101  10K  [0603-RES]  125.09,105.41 270 top
R102  10K  [0603-RES]  129.92,104.14 270 top
R103  1K  [0603-RES]  131.44,95.25 90 top
R104  1K  [0603-RES]  131.44,100.33 270 top
R105  1K  [0603-RES]  131.44,104.14 270 top
U1  FT231XS  [SSOP20_L]  38.1,17.02 180 top
U2  FT231XS  [SSOP20_L]  81.28,17.02 180 top
U3  FT231XS  [SSOP20_L]  124.46,17.02 180 top
U4  FT231XS  [SSOP20_L]  38.1,37.85 180 top
U5  FT231XS  [SSOP20_L]  81.28,37.85 180 top
U6  FT231XS  [SSOP20_L]  124.46,37.85 180 top
U7  FT231XS  [SSOP20_L]  38.1,58.67 180 top
U8  FT231XS  [SSOP20_L]  81.28,58.67 180 top
U9  FT231XS  [SSOP20_L]  124.46,58.67 180 top
U10  FT231XS  [SSOP20_L]  38.1,79.5 180 top
U11  FT231XS  [SSOP20_L]  81.28,79.5 180 top
U12  FT231XS  [SSOP20_L]  124.46,79.5 180 top
U13  FT231XS  [SSOP20_L]  38.1,100.33 180 top
U14  FT231XS  [SSOP20_L]  81.28,100.33 180 top
U15  FT231XS  [SSOP20_L]  124.46,100.33 180 top

## Library data of the parts
C1 C5-C11 C15-C18 C22-C25 C29-C32 C36-C39 C43-C46 C50-C53 C57-C60 C64-C67 C71-C74 C78-C81 C85-C88 C92-C95 C99-C102 = SparkFun-Capacitors; PROD_ID: CAP-00810
C2 C3 C12 C13 C19 C20 C26 C27 C33 C34 C40 C41 C47 C48 C54 C55 C61 C62 C68 C69 C75 C76 C82 C83 C89 C90 C96 C97 C103 C104 = SparkFun-Capacitors; PROD_ID: CAP-08913
C4 C14 C21 C28 C35 C42 C49 C56 C63 C70 C77 C84 C91 C98 C105 = SparkFun-Capacitors; PROD_ID: CAP-00811
D1 D4 D7 D10 D13 D16 D19 D22 D25 D28 D31 D34 D37 D40 D43 = SparkFun-LED; PROD_ID: DIO-00862
D2 D5 D8 D11 D14 D17 D20 D23 D26 D29 D32 D35 D38 D41 D44 = SparkFun-LED; PROD_ID: DIO-00809
D3 D6 D9 D12 D15 D18 D21 D24 D27 D30 D33 D36 D39 D42 D45 = SparkFun-LED; PROD_ID: DIO-09909
E$1 = SparkFun-Retired
E$6 E$8 FID1-FID30 LOGO1-LOGO45 = SparkFun-Aesthetics
F1-F15 = SparkFun-PowerIC
J1-J15 JP1-JP15 = microView-temp
Q1-Q15 = SparkFun-DiscreteSemi; PROD_ID: TRANS-11151
R1 R2 R10 R11 R17 R18 R24 R25 R31 R32 R38 R39 R45 R46 R52 R53 R59 R60 R66 R67 R73 R74 R80 R81 R87 R88 R94 R95 R101 R102 = SparkFun-Resistors; PROD_ID: RES-00824
R3-R5 R12-R14 R19-R21 R26-R28 R33-R35 R40-R42 R47-R49 R54-R56 R61-R63 R68-R70 R75-R77 R82-R84 R89-R91 R96-R98 R103-R105 = SparkFun-Resistors; PROD_ID: RES-07856
R6-R9 R15 R16 R22 R23 R29 R30 R36 R37 R43 R44 R50 R51 R57 R58 R64 R65 R71 R72 R78 R79 R85 R86 R92 R93 R99 R100 = SparkFun-Resistors
U1-U15 = SparkFun-DigitalIC

## Nets
3.3V: C6.1 Q1.1 R1.2 U1.3 U1.13 U1.14
3.3V1: C9.1 Q2.1 R10.2 U2.3 U2.13 U2.14
3.3V2: C16.1 Q3.1 R17.2 U3.3 U3.13 U3.14
3.3V3: C23.1 Q4.1 R24.2 U4.3 U4.13 U4.14
3.3V4: C30.1 Q5.1 R31.2 U5.3 U5.13 U5.14
3.3V5: C37.1 Q6.1 R38.2 U6.3 U6.13 U6.14
3.3V6: C44.1 Q7.1 R45.2 U7.3 U7.13 U7.14
3.3V7: C51.1 Q8.1 R52.2 U8.3 U8.13 U8.14
3.3V8: C58.1 Q9.1 R59.2 U9.3 U9.13 U9.14
3.3V9: C65.1 Q10.1 R66.2 U10.3 U10.13 U10.14
3.3V10: C72.1 Q11.1 R73.2 U11.3 U11.13 U11.14
3.3V11: C79.1 Q12.1 R80.2 U12.3 U12.13 U12.14
3.3V12: C86.1 Q13.1 R87.2 U13.3 U13.13 U13.14
3.3V13: C93.1 Q14.1 R94.2 U14.3 U14.13 U14.14
3.3V14: C100.1 Q15.1 R101.2 U15.3 U15.13 U15.14
5V: C4.A C5.1 F1.2 J1.15 R2.2 R3.2 R4.2 R5.2 U1.15
5V1: C10.1 C14.A F2.2 J2.15 R11.2 R12.2 R13.2 R14.2 U2.15
5V2: C17.1 C21.A F3.2 J3.15 R18.2 R19.2 R20.2 R21.2 U3.15
5V3: C24.1 C28.A F4.2 J4.15 R25.2 R26.2 R27.2 R28.2 U4.15
5V4: C31.1 C35.A F5.2 J5.15 R32.2 R33.2 R34.2 R35.2 U5.15
5V5: C38.1 C42.A F6.2 J6.15 R39.2 R40.2 R41.2 R42.2 U6.15
5V6: C45.1 C49.A F7.2 J7.15 R46.2 R47.2 R48.2 R49.2 U7.15
5V7: C52.1 C56.A F8.2 J8.15 R53.2 R54.2 R55.2 R56.2 U8.15
5V8: C59.1 C63.A F9.2 J9.15 R60.2 R61.2 R62.2 R63.2 U9.15
5V9: C66.1 C70.A F10.2 J10.15 R67.2 R68.2 R69.2 R70.2 U10.15
5V10: C73.1 C77.A F11.2 J11.15 R74.2 R75.2 R76.2 R77.2 U11.15
5V11: C80.1 C84.A F12.2 J12.15 R81.2 R82.2 R83.2 R84.2 U12.15
5V12: C87.1 C91.A F13.2 J13.15 R88.2 R89.2 R90.2 R91.2 U13.15
5V13: C94.1 C98.A F14.2 J14.15 R95.2 R96.2 R97.2 R98.2 U14.15
5V14: C101.1 C105.A F15.2 J15.15 R102.2 R103.2 R104.2 R105.2 U15.15
D+: C3.1 JP1.D+1 R7.1
D+1: C13.1 JP2.D+1 R9.1
D+2: C20.1 JP3.D+1 R16.1
D+3: C27.1 JP4.D+1 R23.1
D+4: C34.1 JP5.D+1 R30.1
D+5: C41.1 JP6.D+1 R37.1
D+6: C48.1 JP7.D+1 R44.1
D+7: C55.1 JP8.D+1 R51.1
D+8: C62.1 JP9.D+1 R58.1
D+9: C69.1 JP10.D+1 R65.1
D+10: C76.1 JP11.D+1 R72.1
D+11: C83.1 JP12.D+1 R79.1
D+12: C90.1 JP13.D+1 R86.1
D+13: C97.1 JP14.D+1 R93.1
D+14: C104.1 JP15.D+1 R100.1
D-: C2.1 JP1.D-1 R6.1
D-1: C12.1 JP2.D-1 R8.1
D-2: C19.1 JP3.D-1 R15.1
D-3: C26.1 JP4.D-1 R22.1
D-4: C33.1 JP5.D-1 R29.1
D-5: C40.1 JP6.D-1 R36.1
D-6: C47.1 JP7.D-1 R43.1
D-7: C54.1 JP8.D-1 R50.1
D-8: C61.1 JP9.D-1 R57.1
D-9: C68.1 JP10.D-1 R64.1
D-10: C75.1 JP11.D-1 R71.1
D-11: C82.1 JP12.D-1 R78.1
D-12: C89.1 JP13.D-1 R85.1
D-13: C96.1 JP14.D-1 R92.1
D-14: C103.1 JP15.D-1 R99.1
DTR: C7.1 Q1.3 R2.1
DTR1: C8.1 Q2.3 R11.1
DTR2: C15.1 Q3.3 R18.1
DTR3: C22.1 Q4.3 R25.1
DTR4: C29.1 Q5.3 R32.1
DTR5: C36.1 Q6.3 R39.1
DTR6: C43.1 Q7.3 R46.1
DTR7: C50.1 Q8.3 R53.1
DTR8: C57.1 Q9.3 R60.1
DTR9: C64.1 Q10.3 R67.1
DTR10: C71.1 Q11.3 R74.1
DTR11: C78.1 Q12.3 R81.1
DTR12: C85.1 Q13.3 R88.1
DTR13: C92.1 Q14.3 R95.1
DTR14: C99.1 Q15.3 R102.1
GND: C1.2 C2.2 C3.2 C4.C C5.2 C6.2 D1.C J1.8 JP1.GND1 U1.6 U1.16
GND1: C9.2 C10.2 C11.2 C12.2 C13.2 C14.C D4.C J2.8 JP2.GND1 U2.6 U2.16
GND2: C16.2 C17.2 C18.2 C19.2 C20.2 C21.C D7.C J3.8 JP3.GND1 U3.6 U3.16
GND3: C23.2 C24.2 C25.2 C26.2 C27.2 C28.C D10.C J4.8 JP4.GND1 U4.6 U4.16
GND4: C30.2 C31.2 C32.2 C33.2 C34.2 C35.C D13.C J5.8 JP5.GND1 U5.6 U5.16
GND5: C37.2 C38.2 C39.2 C40.2 C41.2 C42.C D16.C J6.8 JP6.GND1 U6.6 U6.16
GND6: C44.2 C45.2 C46.2 C47.2 C48.2 C49.C D19.C J7.8 JP7.GND1 U7.6 U7.16
GND7: C51.2 C52.2 C53.2 C54.2 C55.2 C56.C D22.C J8.8 JP8.GND1 U8.6 U8.16
GND8: C58.2 C59.2 C60.2 C61.2 C62.2 C63.C D25.C J9.8 JP9.GND1 U9.6 U9.16
GND9: C65.2 C66.2 C67.2 C68.2 C69.2 C70.C D28.C J10.8 JP10.GND1 U10.6 U10.16
GND10: C72.2 C73.2 C74.2 C75.2 C76.2 C77.C D31.C J11.8 JP11.GND1 U11.6 U11.16
GND11: C79.2 C80.2 C81.2 C82.2 C83.2 C84.C D34.C J12.8 JP12.GND1 U12.6 U12.16
GND12: C86.2 C87.2 C88.2 C89.2 C90.2 C91.C D37.C J13.8 JP13.GND1 U13.6 U13.16
GND13: C93.2 C94.2 C95.2 C96.2 C97.2 C98.C D40.C J14.8 JP14.GND1 U14.6 U14.16
GND14: C100.2 C101.2 C102.2 C103.2 C104.2 C105.C D43.C J15.8 JP15.GND1 U15.6 U15.16
N$1: D1.A R5.1
N$2: C7.2 J1.1
N$3: D5.A R13.1
N$4: D6.A R12.1
N$5: R8.2 U2.12
N$6: R6.2 U1.12
N$7: R7.2 U1.11
N$8: D2.A R4.1
N$9: R9.2 U2.11
N$10: D3.A R3.1
N$11: Q2.2 R10.1 U2.1
N$12: Q1.2 R1.1 U1.1
N$13: D4.A R14.1
N$14: C8.2 J2.1
N$15: D8.A R20.1
N$16: D9.A R19.1
N$17: R15.2 U3.12
N$18: R16.2 U3.11
N$19: Q3.2 R17.1 U3.1
N$20: D7.A R21.1
N$21: C15.2 J3.1
N$22: D11.A R27.1
N$23: D12.A R26.1
N$24: R22.2 U4.12
N$25: R23.2 U4.11
N$26: Q4.2 R24.1 U4.1
N$27: D10.A R28.1
N$28: C22.2 J4.1
N$29: D14.A R34.1
N$30: D15.A R33.1
N$31: R29.2 U5.12
N$32: R30.2 U5.11
N$33: Q5.2 R31.1 U5.1
N$34: D13.A R35.1
N$35: C29.2 J5.1
N$36: D17.A R41.1
N$37: D18.A R40.1
N$38: R36.2 U6.12
N$39: R37.2 U6.11
N$40: Q6.2 R38.1 U6.1
N$41: D16.A R42.1
N$42: C36.2 J6.1
N$43: D20.A R48.1
N$44: D21.A R47.1
N$45: R43.2 U7.12
N$46: R44.2 U7.11
N$47: Q7.2 R45.1 U7.1
N$48: D19.A R49.1
N$49: C43.2 J7.1
N$50: D23.A R55.1
N$51: D24.A R54.1
N$52: R50.2 U8.12
N$53: R51.2 U8.11
N$54: Q8.2 R52.1 U8.1
N$55: D22.A R56.1
N$56: C50.2 J8.1
N$57: D26.A R62.1
N$58: D27.A R61.1
N$59: R57.2 U9.12
N$60: R58.2 U9.11
N$61: Q9.2 R59.1 U9.1
N$62: D25.A R63.1
N$63: C57.2 J9.1
N$64: D29.A R69.1
N$65: D30.A R68.1
N$66: R64.2 U10.12
N$67: R65.2 U10.11
N$68: Q10.2 R66.1 U10.1
N$69: D28.A R70.1
N$70: C64.2 J10.1
N$71: D32.A R76.1
N$72: D33.A R75.1
N$73: R71.2 U11.12
N$74: R72.2 U11.11
N$75: Q11.2 R73.1 U11.1
N$76: D31.A R77.1
N$77: C71.2 J11.1
N$78: D35.A R83.1
N$79: D36.A R82.1
N$80: R78.2 U12.12
N$81: R79.2 U12.11
N$82: Q12.2 R80.1 U12.1
N$83: D34.A R84.1
N$84: C78.2 J12.1
N$85: D38.A R90.1
N$86: D39.A R89.1
N$87: R85.2 U13.12
N$88: R86.2 U13.11
N$89: Q13.2 R87.1 U13.1
N$90: D37.A R91.1
N$91: C85.2 J13.1
N$92: D41.A R97.1
N$93: D42.A R96.1
N$94: R92.2 U14.12
N$95: R93.2 U14.11
N$96: Q14.2 R94.1 U14.1
N$97: D40.A R98.1
N$98: C92.2 J14.1
N$99: D44.A R104.1
N$100: D45.A R103.1
N$101: R99.2 U15.12
N$102: R100.2 U15.11
N$103: Q15.2 R101.1 U15.1
N$104: D43.A R105.1
N$105: C99.2 J15.1
RXD: J1.10 U1.4
RXD1: J2.10 U2.4
RXD2: J3.10 U3.4
RXD3: J4.10 U4.4
RXD4: J5.10 U5.4
RXD5: J6.10 U6.4
RXD6: J7.10 U7.4
RXD7: J8.10 U8.4
RXD8: J9.10 U9.4
RXD9: J10.10 U10.4
RXD10: J11.10 U11.4
RXD11: J12.10 U12.4
RXD12: J13.10 U13.4
RXD13: J14.10 U14.4
RXD14: J15.10 U15.4
RXLED: D3.C U1.17
RXLED1: D6.C U2.17
RXLED2: D9.C U3.17
RXLED3: D12.C U4.17
RXLED4: D15.C U5.17
RXLED5: D18.C U6.17
RXLED6: D21.C U7.17
RXLED7: D24.C U8.17
RXLED8: D27.C U9.17
RXLED9: D30.C U10.17
RXLED10: D33.C U11.17
RXLED11: D36.C U12.17
RXLED12: D39.C U13.17
RXLED13: D42.C U14.17
RXLED14: D45.C U15.17
TXD: J1.9 U1.20
TXD1: J2.9 U2.20
TXD2: J3.9 U3.20
TXD3: J4.9 U4.20
TXD4: J5.9 U5.20
TXD5: J6.9 U6.20
TXD6: J7.9 U7.20
TXD7: J8.9 U8.20
TXD8: J9.9 U9.20
TXD9: J10.9 U10.20
TXD10: J11.9 U11.20
TXD11: J12.9 U12.20
TXD12: J13.9 U13.20
TXD13: J14.9 U14.20
TXD14: J15.9 U15.20
TXLED: D2.C U1.10
TXLED1: D5.C U2.10
TXLED2: D8.C U3.10
TXLED3: D11.C U4.10
TXLED4: D14.C U5.10
TXLED5: D17.C U6.10
TXLED6: D20.C U7.10
TXLED7: D23.C U8.10
TXLED8: D26.C U9.10
TXLED9: D29.C U10.10
TXLED10: D32.C U11.10
TXLED11: D35.C U12.10
TXLED12: D38.C U13.10
TXLED13: D41.C U14.10
TXLED14: D44.C U15.10
VUSB: C1.1 F1.1 JP1.VBUS1
VUSB1: C11.1 F2.1 JP2.VBUS1
VUSB2: C18.1 F3.1 JP3.VBUS1
VUSB3: C25.1 F4.1 JP4.VBUS1
VUSB4: C32.1 F5.1 JP5.VBUS1
VUSB5: C39.1 F6.1 JP6.VBUS1
VUSB6: C46.1 F7.1 JP7.VBUS1
VUSB7: C53.1 F8.1 JP8.VBUS1
VUSB8: C60.1 F9.1 JP9.VBUS1
VUSB9: C67.1 F10.1 JP10.VBUS1
VUSB10: C74.1 F11.1 JP11.VBUS1
VUSB11: C81.1 F12.1 JP12.VBUS1
VUSB12: C88.1 F13.1 JP13.VBUS1
VUSB13: C95.1 F14.1 JP14.VBUS1
VUSB14: C102.1 F15.1 JP15.VBUS1